# Altium PCB PX4FMUv2.4.6.PcbDoc (part 1 of 3)
Units mil, origin at the board's own origin, x right, y up, seen from the top; angles counter-clockwise.
Board outline 2695 x 2965 mil, 2 copper layers (Top, Bottom), stack 12.756 mil thick; 257 components, 261 nets, 1127 pads, 374 vias.
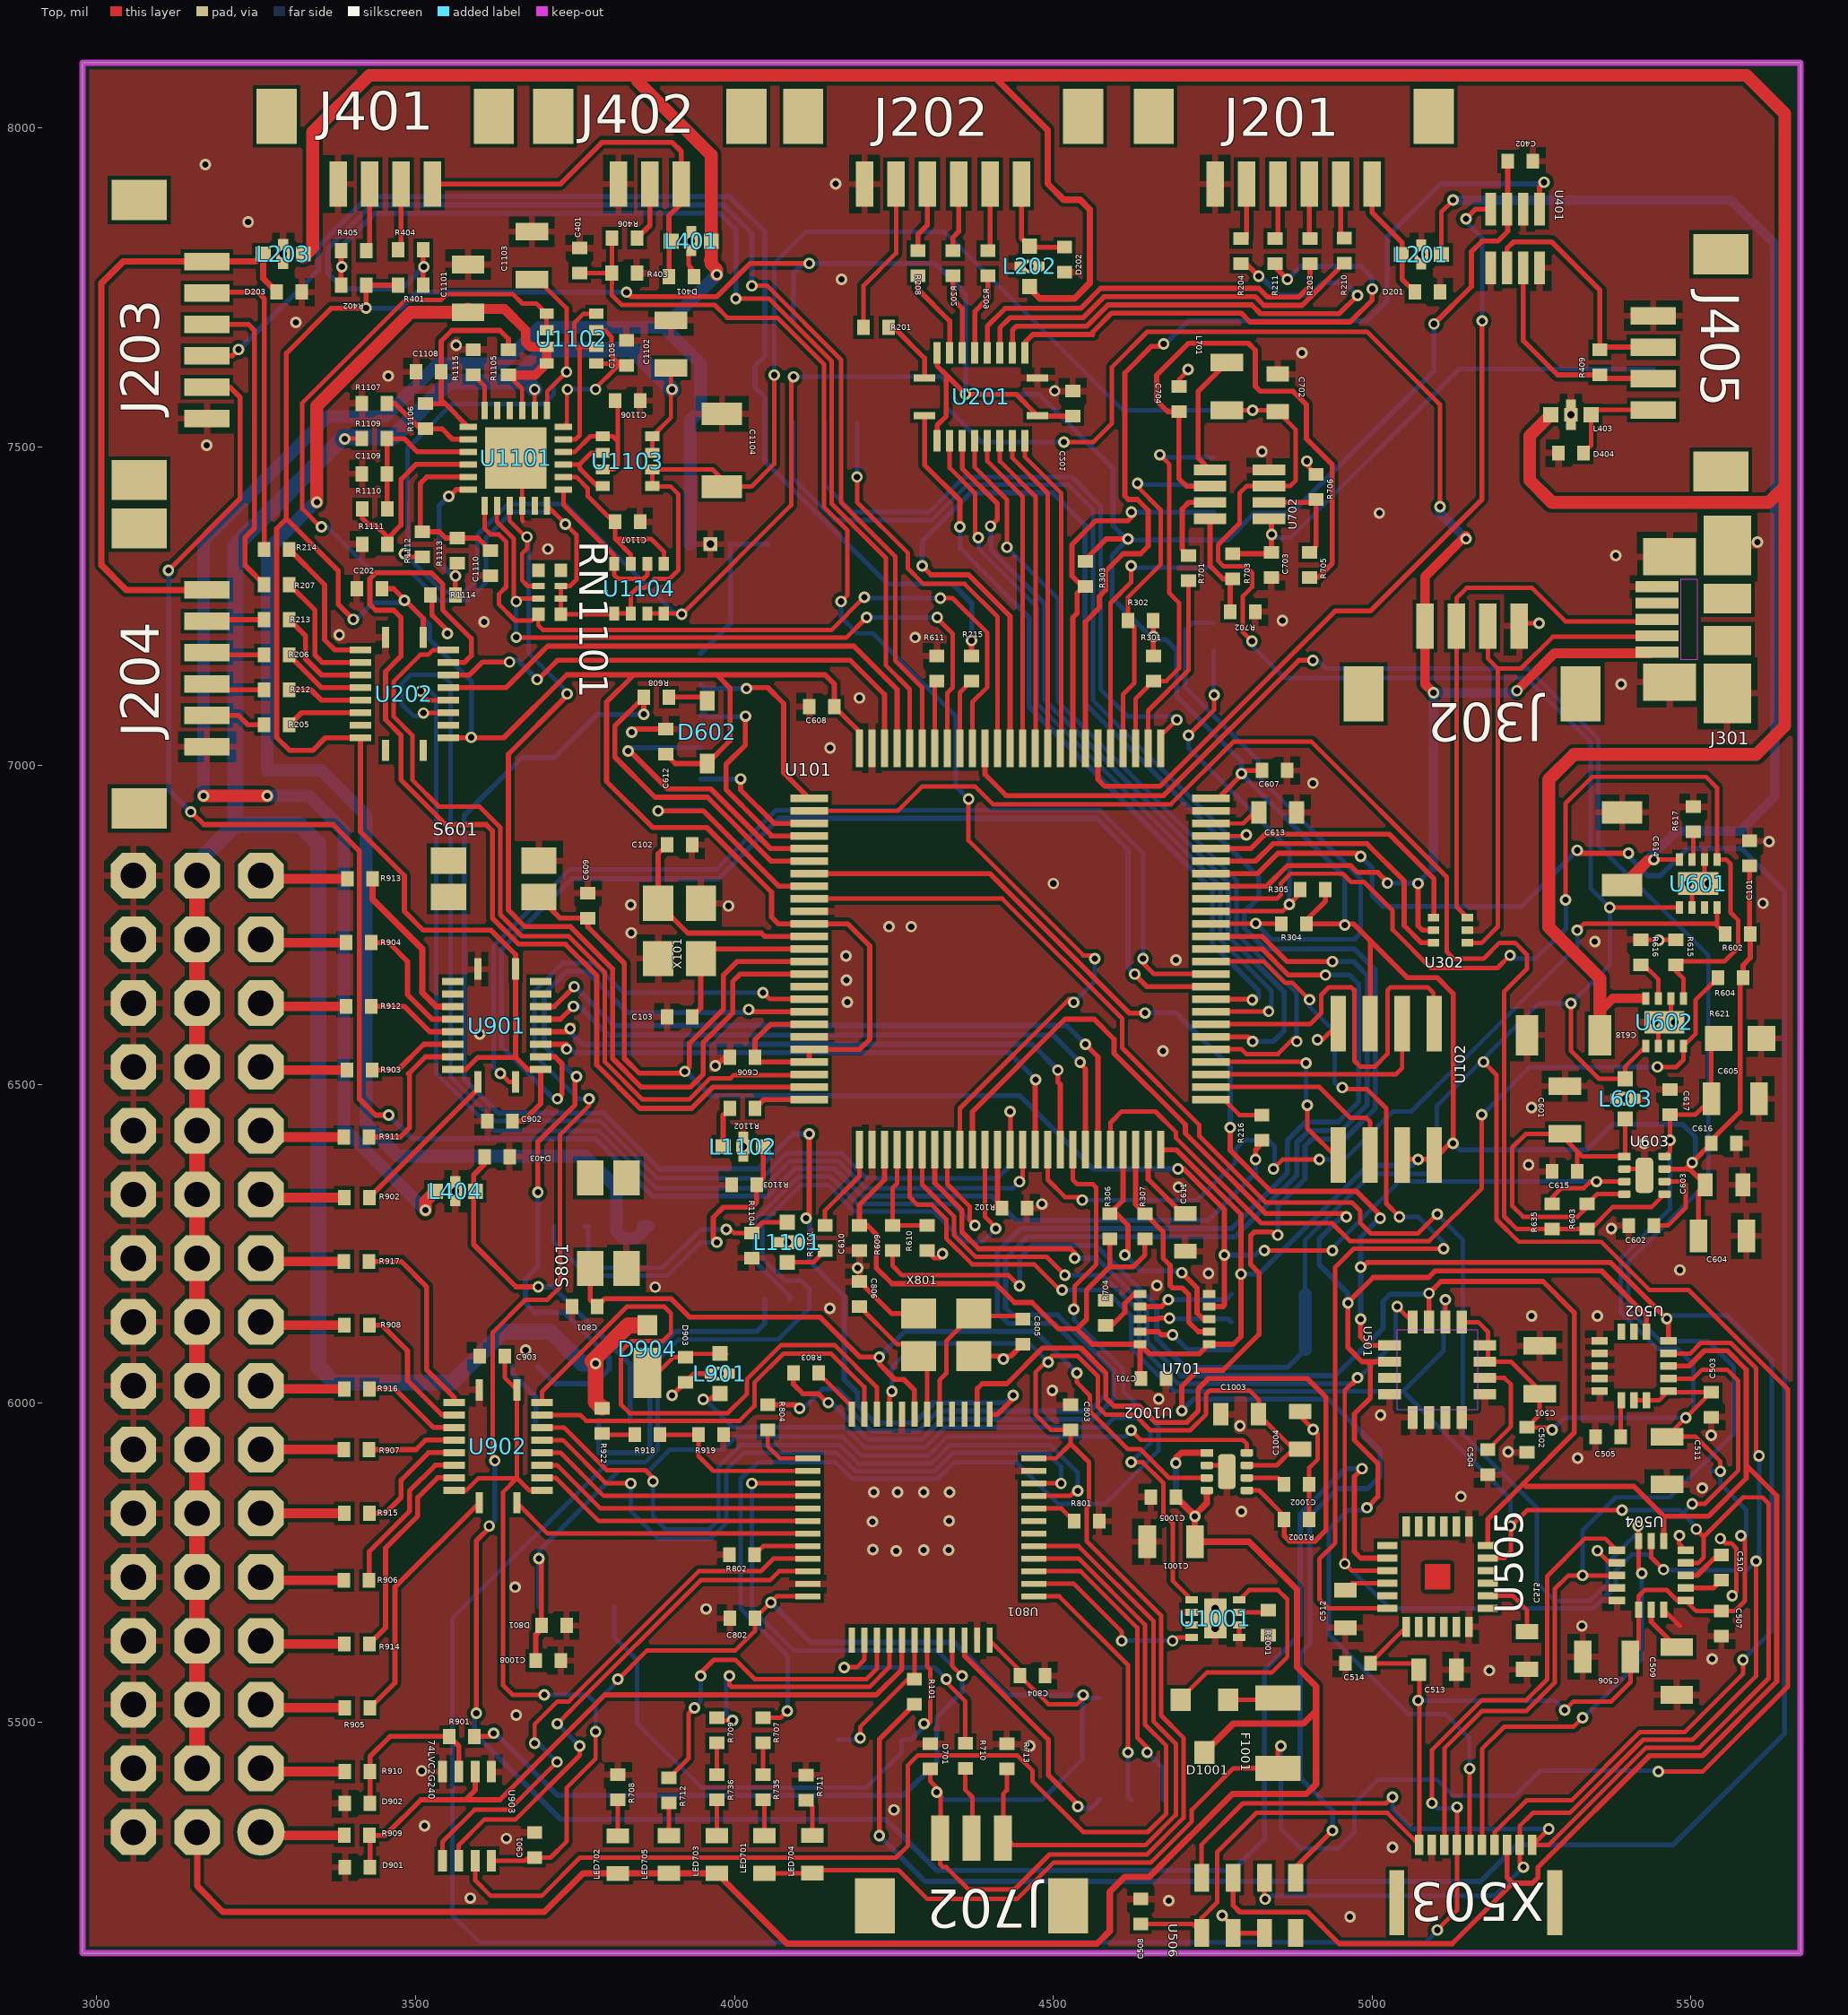
[diagram p0: Top view]
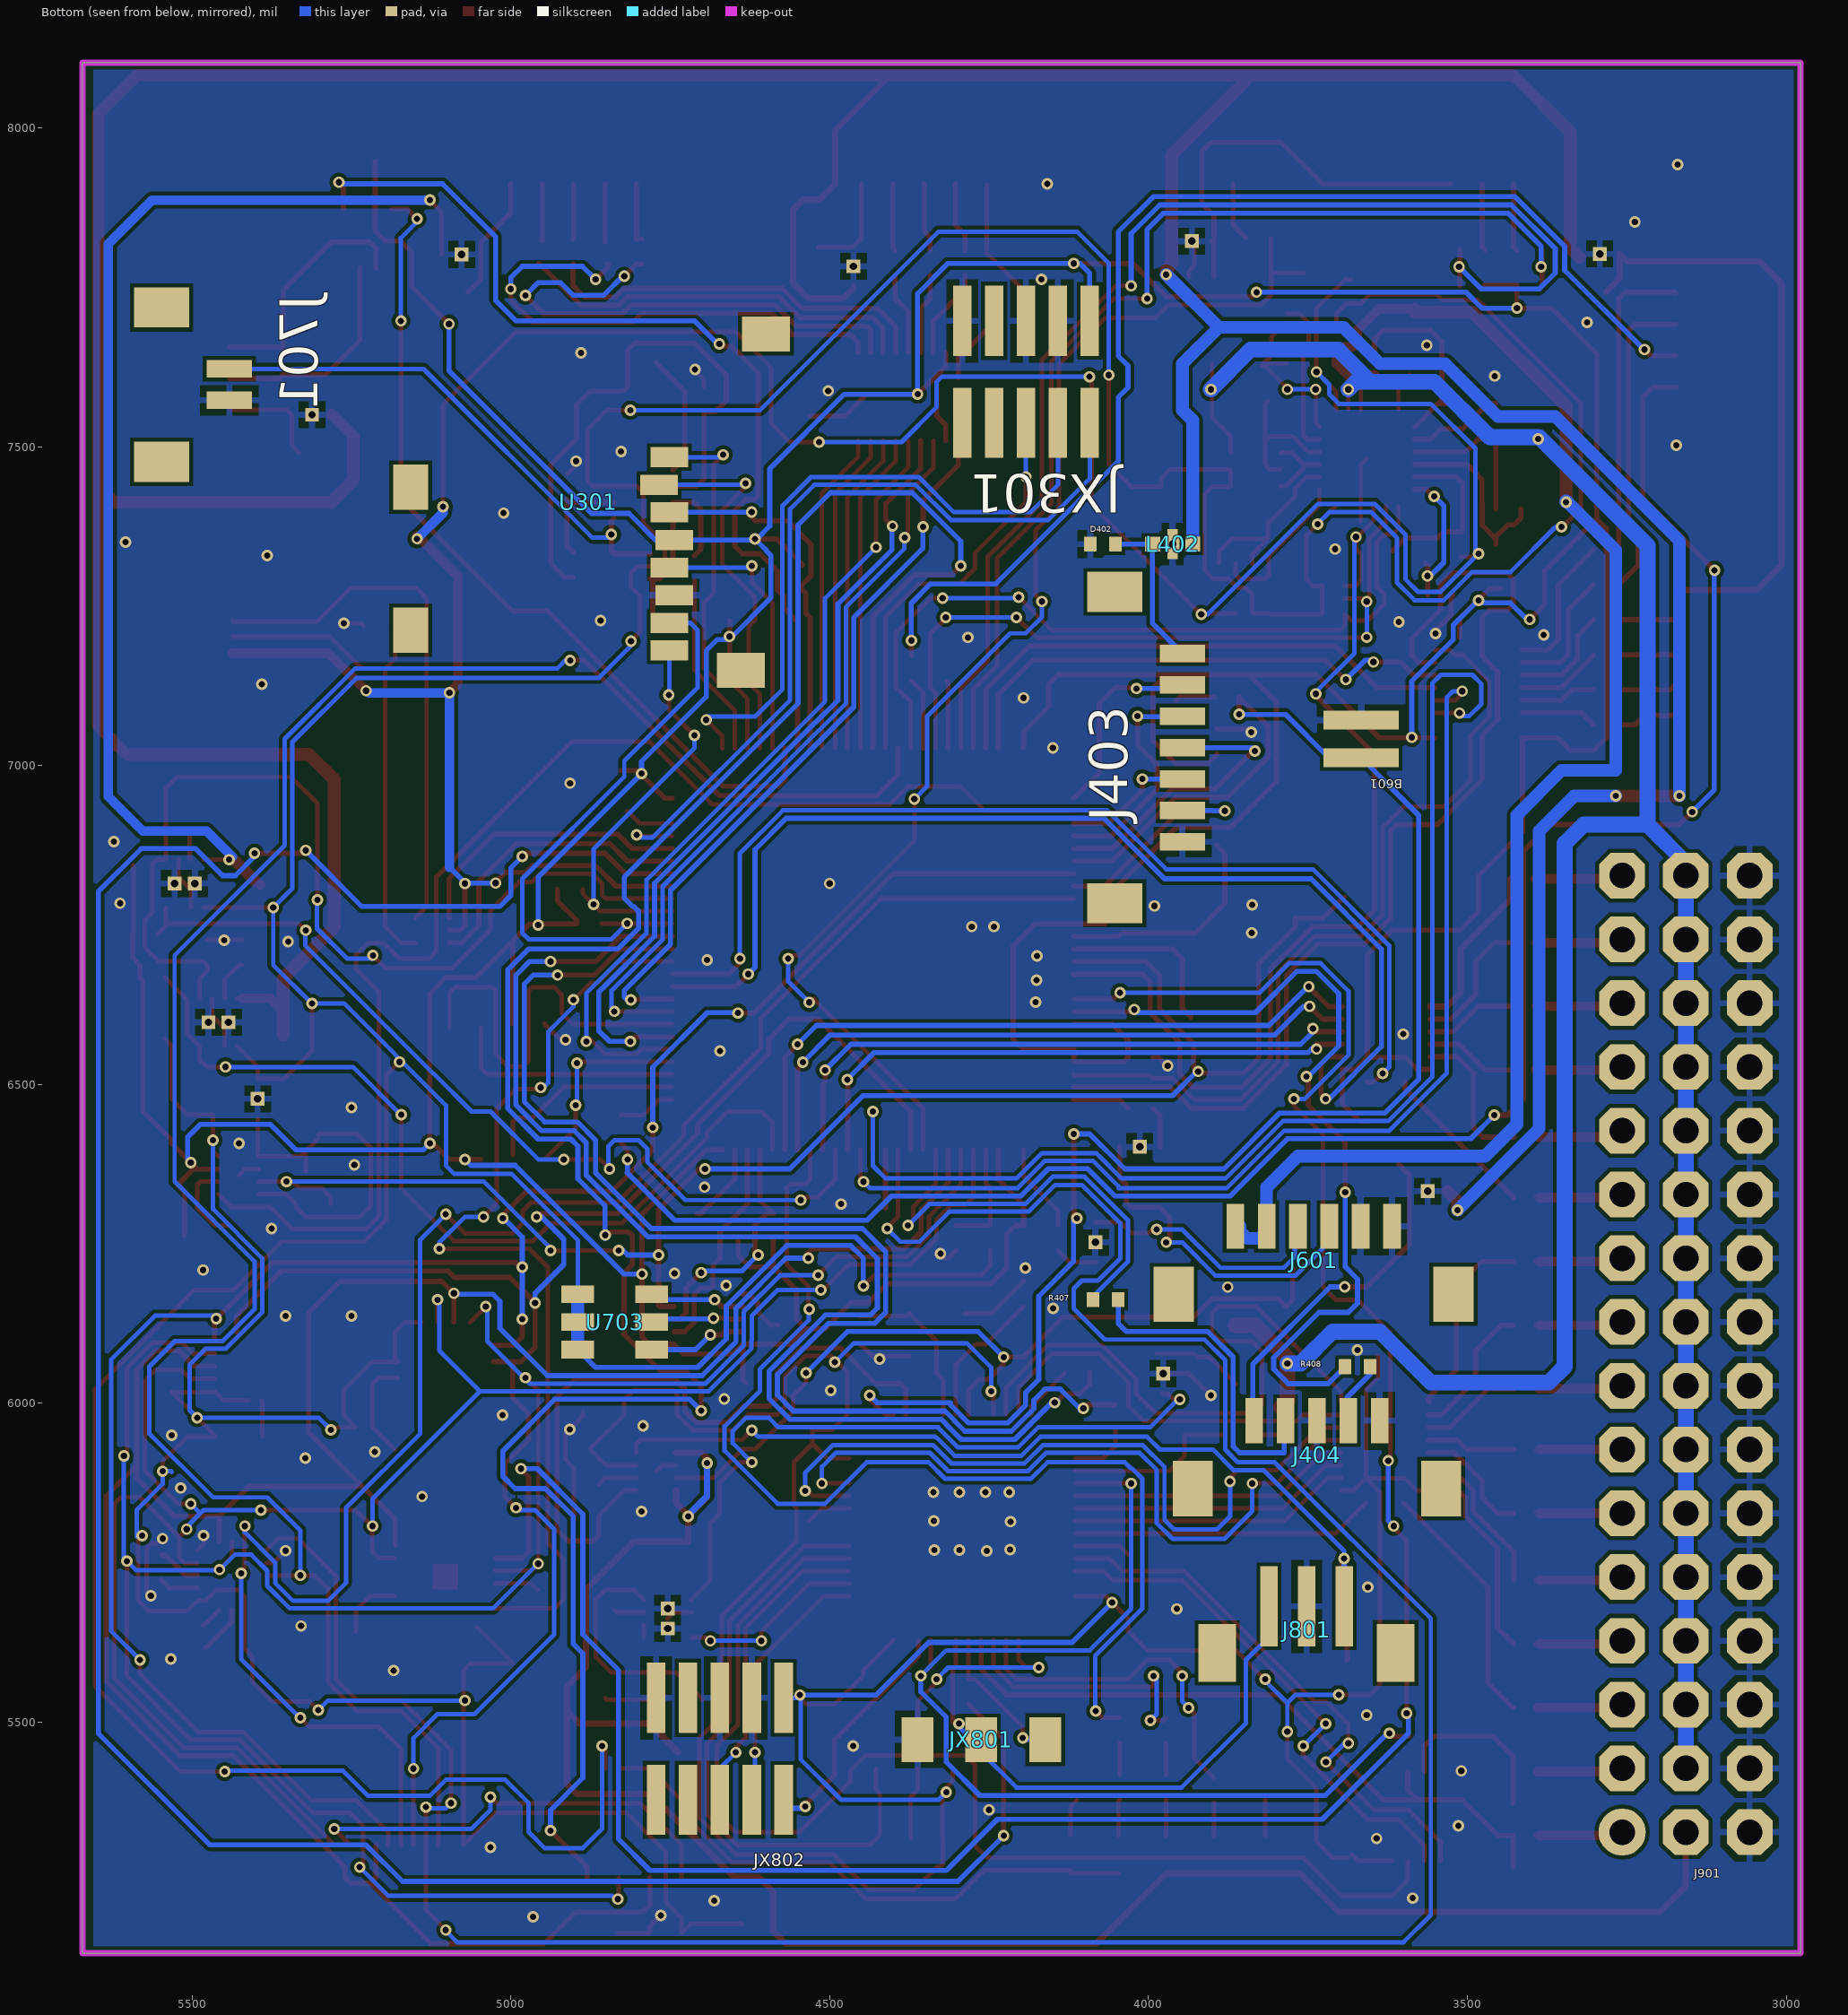
[diagram p1: Bottom view, seen from below]

## Layer stack, top to bottom
Top Solder: solder mask 0.4, Solder Resist, Dk 3.5
Top: signal copper 1.378
Dielectric 1: core 10, FR-4, Dk 4.2
Bottom: signal copper 1.378
Bottom Solder: solder mask 0.4, Solder Resist, Dk 3.5

## Board outline
2977.34,5137.68 5672.34,5137.68 5672.34,8102.68 2977.34,8102.68

## Design rules (kind name [scope] priority, off if disabled: settings)
Clearance Clearance_for_PolygonClass_Isolate_12 [InPolygonClass('Isolate_12')] p1: gap=0 ignorepadtopadclearanceinfootprint=FALSE except(12: Arc-Poly Track-Poly SMDPad-Poly THPad-Poly Via-Poly Fill-Poly Poly-Poly Poly-Region Poly-Text Poly-Hole)
Clearance Clearance_for_PolygonClass_Isolate_10 [InPolygonClass('Isolate_10')] p2: gap=0 ignorepadtopadclearanceinfootprint=FALSE except(10: Arc-Poly Track-Poly SMDPad-Poly THPad-Poly Via-Poly Fill-Poly Poly-Poly Poly-Region Poly-Text Poly-Hole)
Clearance "Clearance (Same Net)" [All] p3: gap=5 ignorepadtopadclearanceinfootprint=FALSE except(0: SMDPad-SMDPad SMDPad-THPad SMDPad-Via; 6: Arc-Fill Arc-Poly Arc-Region Track-Fill Track-Poly Track-Region SMDPad-Fill SMDPad-Poly SMDPad-Region THPad-Fill THPad-Poly THPad-Region Via-Fill Via-Poly Via-Region Fill-Fill Fill-Poly Fill-Region Poly-Poly Poly-Region Region-Region)
Clearance Clearance_for_NetClass_power [InNetClass('power') vs InNetClass('power')] p4: gap=6 ignorepadtopadclearanceinfootprint=FALSE
Clearance [All] p5: gap=5 ignorepadtopadclearanceinfootprint=FALSE except(3: SMDPad-SMDPad; 6: Arc-Fill Arc-Poly Arc-Region Track-Fill Track-Poly Track-Region SMDPad-Fill SMDPad-Poly SMDPad-Region THPad-Fill THPad-Poly THPad-Region Via-Fill Via-Poly Via-Region Fill-Fill Fill-Poly Fill-Region Poly-Poly Poly-Region Region-Region)
HoleSize HoleSize_For_NetClass_power [InNetClass('power')] p1: absolutevalues=TRUE maxlimit=7.87 minlimit=7.87 maxpercent=80.000 minpercent=20.000
HoleSize [All] p2: absolutevalues=TRUE maxlimit=100000 minlimit=7.87 maxpercent=80.000 minpercent=20.000
HoleToHoleClearance mdDrill [All] p1: gap=7.87 allowstackedmicrovias=TRUE
PasteMaskExpansion Expansion_SMDPaste_OFF [InPadClass('SMDPaste_OFF')] p1: expansion=0
PasteMaskExpansion mlMinCreamFrame [All] p2: expansion=-1
PolygonConnect PolygonConnect_For_PolygonThermal_ON_Width100000_Gap80000 [InPolygonClass('PolygonThermal_ON_Width100000_Gap80000')] p1: connectstyle=Relief reliefconductorwidth=10 reliefentries=4 polygonreliefangle="90 Angle" airgapwidth=8
PolygonConnect PolygonConnect_For_PolygonThermal_OFF [InPolygonClass('PolygonThermal_OFF')] p2: connectstyle=Direct reliefconductorwidth=10 reliefentries=4 polygonreliefangle="90 Angle" airgapwidth=10
PolygonConnect ThermalVias [IsVia] p3: connectstyle=Direct reliefconductorwidth=10 reliefentries=4 polygonreliefangle="90 Angle" airgapwidth=10
PolygonConnect [All] p4: connectstyle=Relief reliefconductorwidth=10 reliefentries=4 polygonreliefangle="90 Angle" airgapwidth=10
RoutingVias [All] p1: holewidth=7.87 width=17.72 viastyle="Through Hole" minholewidth=7.87 minwidth=17.72 maxholewidth=100 maxwidth=100
SolderMaskExpansion mlMinStopFrame [All] p1: expansion=1
Width Width_For_NetClass_power [InNetClass('power')] p1: maxlimit=25 minlimit=5.91 preferedwidth=5.91
Width [All] p2: maxlimit=10000 minlimit=5.91 preferedwidth=5.91
27 further rules are at their usual default settings.

## Classes and differential pairs
net class "except gnd": !ACCEL_MAG_CS !BARO_CS !FMU-LED_AMBER !FRAM_CS !GYRO_CS !IO-LED_AMBER !IO-LED_BLUE !IO-LED_SAFETY !MPU_CS !SBUS_OUTPUT_EN !SPI_EXT_NSS !VBUS_VALID !VDD_5V_HIPOWER_OC !VDD_5V_PERIPH_EN !VDD_5V_PERIPH_OC !VDD_BRICK_VALID !VDD_SERVO_VALID ACCEL_DRDY ALARM BATT_CURRENT_SENS BATT_CURRENT_SENS_PROT BATT_VOLTAGE_SENS BATT_VOLTAGE_SENS_PROT CAN1_RX CAN1_TX CAN2_RX CAN2_TX CAN_H CAN_L FMU-!RESET FMU-BOOT0 FMU-CH1 FMU-CH1-PROT FMU-CH2 FMU-CH3 FMU-CH4 FMU-CH5 FMU-CH6 FMU-CH6-PROT FMU-I2C1_SCL FMU-I2C1_SDA FMU-I2C2_SCL FMU-I2C2_SDA FMU-SWCLK FMU-SWDIO FMU-SWO FMU-UART4_RX FMU-UART4_TX FMU-UART7_RX FMU-UART7_TX FMU-UART8_RX FMU-UART8_TX FMU-USART2_CTS FMU-USART2_RTS FMU-USART2_RX FMU-USART2_TX FMU-USART3_CTS FMU-USART3_RTS FMU-USART3_RX FMU-USART3_TX FMU-VDD_3V3 FMU-VDD_5V5 FMU_AUX_ADC1 FMU_AUX_ADC1_PROT FMU_AUX_ADC2 FMU_AUX_ADC2_PROT FRAM_MISO FRAM_MOSI FRAM_SCK GPIO_EXT_1 GYRO_DRDY IO-!RESET IO-!VDD_SERVO_IN_FAULT IO-BOOT0 IO-BOOT1 IO-CH1 IO-CH1-PROT IO-CH2 IO-CH3 IO-CH4 IO-CH5 IO-CH6 IO-CH7 IO-CH8 IO-CH8-PROT IO-SWCLK IO-SWDIO IO-SWO IO-USART1_RX IO-USART1_TX IO-VDD_3V3 IO-VDD_5V5 MAG_DRDY MPU_DRDY N$1 N$2 N$3 N$4 N$5 N$6 N$7 N$8 N$9 N$10 N$11 N$12 N$13 N$14 N$15 N$16 N$17 N$18 N$19 N$20 N$21 N$22 N$23 N$24 N$25 N$26 N$27 N$28 N$29 N$30 N$31 N$32 N$33 N$34 N$35 N$36 N$37 N$38 N$39 N$40 N$41 N$42 N$43 N$44 N$45 N$46 N$47 N$48 N$49 N$50 N$51 N$52 N$53 N$54 N$55 N$56 N$57 N$58 N$59 N$60 N$61 N$62 N$63 N$64 N$65 N$66 N$67 N$68 N$69 N$70 N$71 N$72 N$73 N$74 N$75 N$77 N$78 N$79 N$82 N$83 N$84 N$85 N$86 N$87 N$88 N$89 N$90 N$91 N$92 N$93 N$94 N$95 N$96 N$97 N$98 N$99 N$100 N$101 N$102 N$103 N$104 N$105 N$106 N$107 N$109 N$110 N$113 N$115 OTG_DM1 OTG_DP1 OTG_FS_DM OTG_FS_DP PB2-BOOT1 PPM-SBUS-PROT PPM_INPUT PRESSURE_SENS PRESSURE_SENS_IN RGB_LED_3 RGB_LED_4 RGB_LED_14 RSSI_IN SAFETY SBUS_INPUT SBUS_OUTPUT SDIO_CK SDIO_CMD SDIO_D0 SDIO_D1 SDIO_D2 SDIO_D3 SERIAL1_CTS SERIAL1_RTS SERIAL1_RX SERIAL1_TX SERIAL2_CTS SERIAL2_RTS SERIAL2_RX SERIAL2_TX SERIAL3_RX SERIAL3_TX SERIAL4_RX SERIAL4_TX SERIAL5_RX SERIAL5_TX SERIAL_FMU_TO_IO SERIAL_IO_TO_FMU SPI_EXT_MISO SPI_EXT_MOSI SPI_EXT_SCK SPI_INT_MISO SPI_INT_MOSI SPI_INT_SCK VBAT VBUS VDD_3V3_SENSORS VDD_3V3_SENSORS_EN VDD_3V3_SPEKTRUM VDD_3V3_SPEKTRUM_EN VDD_5V_BRICK VDD_5V_HIPOWER VDD_5V_IN VDD_5V_PERIPH VDD_5V_SENS VDD_SERVO VDD_SERVO_IN VDD_SERVO_SENS
pad class SMDPaste_OFF: U1101-P$25
net class power: FMU-VDD_3V3 FMU-VDD_5V5 GND IO-VDD_3V3 IO-VDD_5V5 MPU_DRDY N$4 N$5 N$41 N$42 N$48 N$97 N$98 N$100 N$101 N$106 N$107 N$110 VBUS VDD_3V3_SENSORS VDD_3V3_SPEKTRUM VDD_5V_BRICK VDD_5V_HIPOWER VDD_5V_IN VDD_5V_PERIPH VDD_SERVO VDD_SERVO_IN

## Components (designator, comment, footprint, x,y, rotation, side; value= is the part's Value field where it differs from the comment)
B601 "MS621FE" MS621FE 3463.95,7042.21 r0 bottom
C101 "0u1" 0402-CAP 5592.34,6862.68 r90 top
C102 "8p" 0402-CAP 3913.88,6875.99 r0 top
C103 "8p" 0402-CAP 3913.88,6605.99 r0 top
C201 "0u1" 0402-CAP 4530.77,7568 r90 top
C202 "0u1" 0402-CAP 3427.34,7277.68 r180 top
C401 "0u1" 0402-CAP 3757.34,7792.37 r90 top
C402 "0u1" 0402-CAP 5232.65,7947.99 r0 top
C501 "10u/10V" 0805-CAP 5262.96,6052.68 r90 top
C502 "0u1" 0402-CAP 5243.36,5942.68 r270 top
C503 "0u1" 0402-CAP 5532.34,5997.99 r270 top
C504 "10n" 0402-CAP 5181.67,5907.68 r270 top
C505 "10n" 0402-CAP 5370.13,5947.68 r180 top
C506 "10u/10V" 0805-CAP 5367.96,5602.68 r180 top
C507 "0u1" 0402-CAP 5547.96,5654.49 r270 top
C508 "0u1" 0402-CAP 4637.34,5202.99 r90 top
C509 "10u/10V" 0805-CAP 5477.96,5580.28 r270 top
C510 "0u47" 0402-CAP 5547.96,5742.68 r90 top
C511 "10u/10V" 0805-CAP 5462.96,5910.28 r270 top
C512 "2u2" 0603-CAP 4958.27,5677.68 r270 top
C513 "2u2" 0603-CAP 5102.96,5582.37 r0 top
C514 "0u1" 0402-CAP 4977.96,5592.37 r180 top
C515 "0u01" 0603-CAP 5242.96,5612.37 r270 top
C601 "10u/25V" 0805-CAP 5302.34,6460.08 r90 top
C602 "10n" 0402-CAP 5422.34,6278.9 r0 top
C603 "1u" 0603-CAP 5552.34,6342.68 r0 top
C604 "22u/25V" 0805-CAP 5549.74,6262.68 r0 top
C605 "22u/25V" 0805-CAP 5569.74,6477.68 r0 top
C606 "0u1" 0402-CAP 4012.65,6542.68 r180 top
C607 "0u1" 0402-CAP 4847.34,6992.68 r0 top
C608 "0u1" 0402-CAP 4137.07,7092.68 r180 top
C609 "0u1" 0402-CAP 3770.09,6780.8 r270 top
C610 "0u1" 0402-CAP 4196.12,6259.38 r270 top
C611 "2u2" 0603-CAP 4707.34,6268.15 r270 top
C612 "0u1" 0402-CAP 3892.34,7037.99 r90 top
C613 "2u2" 0603-CAP 4852.34,6926.86 r0 top
C614 "100u" 1206-CAP 5392.34,6869.77 r90 top
C615 "0u1" 0402-CAP 5302.34,6363.84 r180 top
C616 "0u1" 0402-CAP 5552.03,6407.68 r0 top
C617 "0u1" 0402-CAP 5467.34,6472.68 r90 top
C618 "100u" 1206-CAP 5300.45,6577.44 r180 top
C701 "0u1" 0402-CAP 4657.34,6038.99 r0 top
C702 "1u" 0603-CAP 4852.34,7584.85 r90 top
C703 "5n6" 0402-CAP 4842.34,7314.85 r270 top
C704 "0u47" 0402-CAP 4697.34,7574.85 r90 top
C801 "0u1" 0402-CAP 3764.88,6151.86 r0 top
C802 "0u1" 0402-CAP 4012.34,5662.99 r180 top
C803 "0u1" 0402-CAP 4527.34,5977.99 r90 top
C804 "0u1" 0402-CAP 4467.34,5572.99 r0 top
C805 "8p" 0402-CAP 4452.34,6112.68 r270 top
C806 "8p" 0402-CAP 4196.12,6171.54 r270 top
C901 "0u1" 0402-CAP 3686.71,5307.36 r90 top
C902 "0u1" 0402-CAP 3632.34,6442.68 r180 top
C903 "0u1" 0402-CAP 3619.94,6074.22 r180 top
C1001 "10u/25V" 0805-CAP 4684.94,5782.99 r180 top
C1002 "10n" 0402-CAP 4882.03,5872.99 r0 top
C1003 "1u" 0603-CAP 4792.34,5982.99 r180 top
C1004 "10u" 0603-CAP 4887.34,5957.99 r90 top
C1005 "0u1" 0402-CAP 4672.65,5852.99 r180 top
C1008 "2u2" 0402-CAP 3708.09,5596.8 r0 top
C1101 "22u/25V" 0805-CAP 3582.34,7748.67 r90 top
C1102 "22u/25V" 0805-CAP 3900.37,7661.3 r90 top
C1103 "22u/25V" 0805-CAP 3682.34,7800.08 r90 top
C1104 "100u" 1206-CAP 3980.48,7494.77 r90 top
C1105 "0u1" 0402-CAP 3830.79,7647.53 r90 top
C1106 "0u1" 0402-CAP 3832.34,7572.68 r0 top
C1107 "0u1" 0402-CAP 3832.34,7382.68 r0 top
C1108 "10p/25V" 0402-CAP 3520.48,7617.84 r180 top
C1109 "10p/25V" 0402-CAP 3435.48,7457.84 r180 top
C1110 "10p/25V" 0402-CAP 3617.34,7317.84 r270 top
D201 "PESD0402-140" 0402-TVS 5087.02,7742.96 r0 top
D202 "PESD0402-140" 0402-TVS 4517.89,7793.58 r270 top
D203 "PESD0402-140" 0402-TVS 3302.03,7742.96 r0 top
D401 "PESD0402-140" 0402-TVS 3917.34,7766.93 r0 top
D402 "PESD0402-140" 0402-TVS 4072.03,7347.68 r0 bottom
D403 "PESD0402-140" 0402-TVS 3627.65,6386.93 r0 top
D404 "PESD0402-140" 0402-TVS 5312.03,7490.47 r180 top
D602 "RB751V40T1G" SOD323 3957.34,7052.68 r270 top
D701 "PESD0402-140" 0402-TVS 4307.34,5446.48 r90 top
D801 "PESD0402-140" 0402-TVS 3717.03,5651.8 r0 top
D901 "PESD0402-140" 0402-TVS 3408.74,5272.68 r180 top
D902 "PESD0402-140" 0402-TVS 3408.74,5372.68 r180 top
D903 "PESD0402-140" 0402-TVS 3923.13,6052.99 r270 top
D904 "MSS1P4-M3" MICROSMP 3863.59,6096.89 r90 top
D1001 "PMEG2005CT" SOT23-3 4737.34,5495.99 r180 top
F1001 "0ZCA0035FF2G" PTC-1206 4852.34,5482.68 r90 top
J201 "" DF13C-6P-1.25V 4877.34,7947.68 r180 top
J202 "" DF13C-6P-1.25V 4327.34,7947.68 r180 top
J203 "" DF13C-6P-1.25V 3137.34,7667.68 r270 top
J204 "" DF13C-6P-1.25V 3137.34,7152.68 r270 top
J301 "47346-0001" MOLEX-47346-0001 5557.34,7229.46 r180 top
J302 "" DF13C-4P-1.25V 5157.06,7183.55 r0 top
J401 "" DF13C-4P-1.25V 3452.34,7947.68 r180 top
J402 "" DF13C-3P-1.25V 3867.34,7947.68 r180 top
J403 "" DF13C-7P-1.25V 3982.34,7028.47 r270 bottom
J404 "" DF13C-5P-1.25V 3735.96,5937.25 r180 bottom
J405 "" DF13C-4P-1.25V 5476.47,7631.93 r90 top
J601 "" DF13C-6P-1.25V 3741.16,6242.25 r180 bottom
J701 "" DF13C-2P-1.25V 5477.34,7597.68 r270 bottom
J702 "" DF13C-3P-1.25V 4371.94,5282.68 r0 top
J801 "" JST-ZH-SMT-VERTICAL 3752.34,5612.68 r0 bottom
J901 "" 3X16RA 3157.34,6077.68 r0 bottom
JX301 "ARM_MINI_JTAG-SMT" FTSH-105-01-XXX-DV-K 4192.34,7617.66 r0 bottom
JX801 "" HEADER_3X01_SMD_H_BOARD_EDGE_SHORT 4262.34,5472.68 r0 bottom
JX802 "ARM_MINI_JTAG-SMT" FTSH-105-01-XXX-DV-K 4672.34,5458.3 r0 bottom
L201 "" KYOCERA-KNH16-DA 5077.34,7801.93 r180 top
L202 "" KYOCERA-KNH16-DA 4462.89,7783.27 r90 top
L203 "" KYOCERA-KNH16-DA 3292.34,7802.68 r180 top
L401 "" KYOCERA-KNH16-DA 3932.34,7822.68 r180 top
L402 "" KYOCERA-KNH16-DA 3962.34,7347.68 r0 bottom
L403 "" KYOCERA-KNH16-DA 5312.03,7550.47 r0 top
L404 "" KYOCERA-KNH16-DA 3562.34,6332.68 r0 top
L603 "" KYOCERA-KNH16-DA 5397.34,6477.68 r270 top
L701 "47uH" 0805-IND 4772.34,7594.85 r90 top
L901 "" KYOCERA-KNH16-DA 3977.34,6046.78 r270 top
L1101 "" KYOCERA-KNH16-DA 4083.09,6252.68 r270 top
L1102 "" KYOCERA-KNH16-DA 4013.84,6402.68 r180 top
LED701 "AMBER" 0603-LED 4046.94,5292.52 r270 top
LED702 "GREEN" 0603-LED 3817.34,5292.36 r270 top
LED703 "AMBER" 0603-LED 3972.34,5292.52 r270 top
LED704 "GREEN" 0603-LED 4122.34,5292.99 r270 top
LED705 "BLUE" 0603-LED 3897.34,5292.52 r270 top
R101 "470R" 0402-RES 4282.34,5547.99 r90 top
R102 "10K" 0402-RES 4439.35,6306.11 r0 top
R201 "120R" 0402-RES 4222.34,7687.68 r180 top
R202 "120R" 0402-RES 4342.89,7788.27 r90 top
R203 "120R" 0402-RES 4902.89,7806.93 r90 top
R204 "120R" 0402-RES 4794.47,7806.93 r90 top
R205 "120R" 0402-RES 3282.34,7064.14 r180 top
R206 "120R" 0402-RES 3282.34,7173.98 r180 top
R207 "120R" 0402-RES 3282.34,7284.14 r180 top
R208 "120R" 0402-RES 4287.89,7788.27 r90 top
R209 "120R" 0402-RES 4397.58,7788.27 r90 top
R210 "120R" 0402-RES 4956.71,7807.68 r90 top
R211 "120R" 0402-RES 4847.89,7806.93 r90 top
R212 "120R" 0402-RES 3282.34,7119.14 r180 top
R213 "120R" 0402-RES 3282.34,7229.14 r180 top
R214 "120R" 0402-RES 3282.34,7339.14 r180 top
R215 "120R" 0402-RES 4371.94,7152.68 r90 top
R216 "120R" 0402-RES 4827.34,6432.68 r270 top
R301 "100K" 0402-RES 4657.34,7152.68 r90 top
R302 "100K" 0402-RES 4637.34,7227.68 r0 top
R303 "100K" 0402-RES 4550.45,7300.73 r90 top
R304 "100K" 0402-RES 4877.34,6752.05 r0 top
R305 "100K" 0402-RES 4907.34,6805.79 r0 top
R306 "1K5" 0402-RES 4588.88,6277.99 r270 top
R307 "1K5" 0402-RES 4643.88,6277.99 r270 top
R401 "1K5" 0402-RES 3492.34,7753.61 r180 top
R402 "1K5" 0402-RES 3402.65,7753.61 r0 top
R403 "10K/0.1%" 0402-RES 3827.34,7772.68 r180 top
R404 "120R" 0402-RES 3492.03,7809.12 r180 top
R405 "120R" 0402-RES 3402.65,7807.68 r0 top
R406 "10K/0.1%" 0402-RES 3827.65,7827.68 r0 top
R407 "10K/0.1%" 0402-RES 4067.34,6162.68 r180 bottom
R408 "10K/0.1%" 0402-RES 3672.03,6057.68 r180 bottom
R409 "120R" 0402-RES 5357.54,7632.68 r90 top
R602 "1M" 0402-RES 5573.78,6736.29 r0 top
R603 "10K" 0402-RES 5337.34,6292.99 r270 top
R604 "1M" 0402-RES 5562.34,6667.68 r0 top
R608 "1K" 0402-RES 3877.65,7107.68 r0 top
R609 "10K/0.1%" 0402-RES 4248.13,6259.38 r270 top
R610 "10K/0.1%" 0402-RES 4302.34,6259.38 r270 top
R611 "10K" 0402-RES 4317.34,7152.68 r270 top
R615 "10K" 0402-RES 5476.71,6707.48 r90 top
R616 "25K5" 0402-RES 5421.71,6707.48 r90 top
R617 "16K5" 0402-RES 5504.09,6916.29 r90 top
R621 "220R" 0603-RES 5577.34,6572.68 r180 top
R635 "10K" 0402-RES 5282.65,6292.99 r270 top
R701 "9K09" 0402-RES 4712.34,7309.85 r270 top
R702 "10K" 0402-RES 4797.34,7241.42 r0 top
R703 "100K" 0402-RES 4781.5,7312.78 r270 top
R704 "10K" 0402-RES 4582.34,6142.17 r270 top
R705 "453K" 0402-RES 4902.34,7315.16 r90 top
R706 "16K5" 0402-RES 4912.34,7437.37 r90 top
R707 "220R" 0402-RES 4045.12,5487.68 r270 top
R708 "220R" 0402-RES 3817.34,5397.83 r270 top
R709 "220R" 0402-RES 3972.34,5487.52 r270 top
R710 "68R" 0402-RES 4362.34,5447.2 r90 top
R711 "220R" 0402-RES 4112.34,5397.68 r270 top
R712 "220R" 0402-RES 3897.34,5392.83 r270 top
R713 "1K5" 0402-RES 4427.34,5446.48 r90 top
R735 "220R" 0402-RES 4045.12,5397.99 r270 top
R736 "220R" 0402-RES 3972.34,5397.83 r270 top
R801 "10K" 0402-RES 4552.34,5815.43 r0 top
R802 "10K" 0402-RES 4012.03,5762.68 r180 top
R803 "220R" 0402-RES 4112.34,6047.68 r180 top
R804 "220R" 0402-RES 4052.34,5978.3 r90 top
R901 "10K" 0402-RES 3572.34,5477.68 r180 top
R902 "220R" 0402-RES 3407.59,6322.68 r180 top
R903 "220R" 0402-RES 3412.34,6522.68 r180 top
R904 "220R" 0402-RES 3411.03,6722.68 r180 top
R905 "220R" 0402-RES 3408.74,5522.68 r180 top
R906 "220R" 0402-RES 3407.34,5722.68 r180 top
R907 "220R" 0402-RES 3407.34,5927.68 r180 top
R908 "220R" 0402-RES 3407.65,6122.68 r180 top
R909 "220R" 0402-RES 3407.59,5322.68 r180 top
R910 "220R" 0402-RES 3408.74,5422.68 r180 top
R911 "220R" 0402-RES 3407.34,6417.68 r180 top
R912 "220R" 0402-RES 3411.03,6622.68 r180 top
R913 "220R" 0402-RES 3412.74,6822.68 r180 top
R914 "220R" 0402-RES 3407.65,5622.68 r180 top
R915 "220R" 0402-RES 3407.59,5827.68 r180 top
R916 "220R" 0402-RES 3407.59,6022.68 r180 top
R917 "220R" 0402-RES 3407.34,6222.68 r180 top
R918 "10K/0.1%" 0402-RES 3863.44,5950.99 r180 top
R919 "10K/0.1%" 0402-RES 3963.13,5950.99 r180 top
R922 "10K/0.1%" 0402-RES 3792.34,5972.68 r90 top
R1001 "100K" 0402-RES 4837.34,5656.46 r90 top
R1002 "10K" 0402-RES 4882.03,5817.99 r180 top
R1101 "10K/0.1%" 0402-RES 4142.34,6259.38 r270 top
R1102 "10K/0.1%" 0402-RES 4012.65,6462.68 r180 top
R1103 "1M" 0402-RES 4015.17,6342.68 r180 top
R1104 "1M" 0402-RES 4027.34,6247.68 r270 top
R1105 "453K" 0402-RES 3645.48,7632.53 r90 top
R1106 "56K" 0402-RES 3515.48,7548.15 r270 top
R1107 "105K" 0402-RES 3435.48,7568 r180 top
R1109 "453K" 0402-RES 3435.48,7513 r0 top
R1110 "56K" 0402-RES 3435.79,7402.84 r180 top
R1111 "105K" 0402-RES 3435.79,7347.22 r180 top
R1112 "453K" 0402-RES 3510.48,7347.22 r90 top
R1113 "56K" 0402-RES 3565.48,7337.53 r270 top
R1114 "105K" 0402-RES 3542.65,7267.68 r180 top
R1115 "0R" 0402-RES 3590.48,7632.84 r270 top
RN1101 "1M" EXB28V 3710.06,7272.13 r270 top
S601 "RESET" EVQP7J01K 3622.65,6822.68 r180 top
S801 "RESET" EVQP7J01K 3802.34,6282.68 r90 top
U101 "STM32F4X7VX" TQFP100 4432.34,6712.68 r0 top
U102 "FM25V01" SO08 5022.34,6492.37 r180 top
U201 "" QFN20-RGY 4386.87,7578.78 r90 top
U202 "" QFN20-RGY 3482.34,7112.68 r180 top
U301 "" MICROSD 4858.13,7407.56 r270 bottom
U302 "NUF2042XV6" SOT563-6 5123.14,6742.05 r90 top
U401 "MAX3051" SOT23-8 5224.54,7826.77 r180 top
U501 "L3GD20" L3G4200DH-MAN 5102.34,6052.68 r270 top
U502 "L3GD20H" LGA-16L 5410.96,6058.68 r180 top
U504 "LSM303D" LGA-16L 5437.96,5730.28 r180 top
U505 "MPU-6000" QFN-24 5102.96,5727.99 r270 top
U506 "MS5611-01BA" MS5611-01BA 4806.72,5212.68 r90 top
U601 "" QFN8-DSG 5511.87,6815.28 r0 top
U602 "" QFN8-DSG 5458.84,6597.68 r0 top
U603 "MIC5332" MLF-8-EPAD 5427.34,6357.68 r0 top
U701 "TCA62724FMG" SON10 4690.37,6132.17 r90 top
U702 "LT3469" SOT23-8 4792.34,7425.69 r90 top
U703 "" 6-PLCC 4837.34,6127.68 r0 bottom
U801 "STM32F10XCXT6" TQFP48 4292.34,5805.59 r180 top
U901 "" QFN20-RGY 3627.34,6592.68 r180 top
U902 "" QFN20-RGY 3629.34,5932.68 r180 top
U903 "74LVC2G240" TSSOP8_SOT505-2 3580.65,5352.68 r180 top
U1001 "" QFN8-DSG 4754.31,5662.68 r270 top
U1002 "MIC5332" MLF-8-EPAD 4772.34,5892.99 r0 top
U1101 "" MO-220 3657.18,7482.48 r0 top
U1102 "" 1206-8 3744.48,7669.84 r90 top
U1103 "" 1206-8 3832.34,7477.68 r270 top
U1104 "" 1206-8 3850.48,7277.84 r180 top
X101 "3.2x2.5 mm / 24 MHz / 15 ppm" OSCILLATOR-3.2X2.5 3913.88,6740.99 r90 top
X503 "" 51281-1094 5074.23,5307.68 r0 top
X801 "3.2x2.5 mm / 24 MHz / 15 ppm" OSCILLATOR-3.2X2.5 4332.34,6107.68 r0 top

## Footprints (in the part's own frame and the unit in brackets; to place one, negate y for a bottom-side part, rotate by r counter-clockwise, add the part's x,y. Pads: shape width x height; smd on the part's side, far side on the other; paste and mask are expansions set on the pad)
3X16RA [mil] "3X16RA"
  round 74 / inner round 60 / far side round 74 hole 40: 1(100,750)
  oct 71.65x71.65 / inner oct 60x60 / far side oct 71.65x71.65 hole 40: 2(0,750) 3(-100,750) 4(100,650) 5(0,650) 6(-100,650) 7(100,550) 8(0,550) 9(-100,550) 10(100,450) 11(0,450) 12(-100,450) 13(100,350) 14(0,350) 15(-100,350) 16(100,250) 17(0,250) 18(-100,250) 19(100,150) 20(0,150) 21(-100,150) 22(100,50) 23(0,50) 24(-100,50) 25(100,-50) 26(0,-50) 27(-100,-50) 28(100,-150) 29(0,-150) 30(-100,-150) 31(100,-250) 32(0,-250) 33(-100,-250) 34(100,-350) 35(0,-350) 36(-100,-350) 37(100,-450) 38(0,-450) 39(-100,-450) 40(100,-550) 41(0,-550) 42(-100,-550) 43(100,-650) 44(0,-650) 45(-100,-650) 46(100,-750) 47(0,-750) 48(-100,-750)
6-PLCC [mil] "6-PLCC"
  rect 51.18x27.56 smd: A1(58.07,43.31) A2(58.07,0) A3(58.07,-43.31) C1(-58.07,43.31) C2(-58.07,0) C3(-58.07,-43.31)
0402-CAP [mil] "0402-CAP"
  rect 19.69x23.62 smd: P$1(-19.69,0) P$2(19.69,0)
0402-RES [mil] "0402-RES"
  rect 19.69x23.62 smd: P$1(-19.69,0) P$2(19.69,0)
0402-TVS [mil] "0402-TVS"
  rect 19.69x23.62 smd: A(19.69,0) C(-19.69,0)
0603-CAP [mil] "0603-CAP"
  rect 23.62x35.43 smd: P$1(-29.53,0) P$2(29.53,0)
0603-LED [mil] "0603-LED"
  rect 23.62x35.43 smd: A(29.53,0) C(-29.53,0)
0603-RES [mm] "0603-RES"
  rect 1.1x1 smd: 1(-0.85,0) 2(0.85,0)
0805-CAP [mil] "0805-CAP"
  rect 27.56x51.18 smd: P$1(-37.4,0) P$2(37.4,0)
0805-IND [mil] "0805-IND"
  rect 27.56x51.18 smd: P$1(-37.4,0) P$2(37.4,0)
1206-8 [mil] "1206-8"
  rect 16x22 smd: P$1(-39,-39) P$2(-13,-39) P$3(13,-39) P$4(39,-39) P$5(39,39) P$6(13,39) P$7(-13,39) P$8(-39,39)
1206-CAP [mil] "1206-CAP"
  rect 35.43x62.99 smd: P$1(-57.09,0) P$2(57.09,0)
51281-1094 [mil] "51281-1094"
  rect 13.39x31.5 smd: 1(0,0) 2(19.69,0) 3(39.37,0) 4(59.06,0) 5(78.74,0) 6(98.43,0) 7(118.11,0) 8(137.8,0) 9(157.48,0) 10(177.17,0)
  rect 23.62x102.36 smd: P$11(-35.43,-90.55) P$12(212.6,-90.55)
DF13C-2P-1.25V [mil] "DF13C-2P-1.25V"
  rect 27.56x70.87 smd: 1(-24.61,35.43) 2(24.61,35.43)
  rect 62.99x86.61 smd: M$0(121.06,-70.87) M$1(-121.06,-70.87)
DF13C-3P-1.25V [mil] "DF13C-3P-1.25V"
  rect 27.56x70.87 smd: 1(-49.21,35.43) 2(0,35.43) 3(49.21,35.43)
  rect 62.99x86.61 smd: M$0(151.57,-70.87) M$1(-151.57,-70.87)
DF13C-4P-1.25V [mil] "DF13C-4P-1.25V"
  rect 27.56x70.87 smd: 1(-73.82,35.43) 2(-24.61,35.43) 3(24.61,35.43) 4(73.82,35.43)
  rect 62.99x86.61 smd: M$0(170.28,-70.87) M$1(-170.28,-70.87)
DF13C-5P-1.25V [mil] "DF13C-5P-1.25V"
  rect 27.56x70.87 smd: 1(-98.43,35.43) 2(-49.21,35.43) 3(0,35.43) 4(49.21,35.43) 5(98.43,35.43)
  rect 62.99x86.61 smd: M$0(194.88,-70.87) M$1(-194.88,-70.87)
DF13C-6P-1.25V [mil] "DF13C-6P-1.25V"
  rect 27.56x70.87 smd: 1(-123.03,35.43) 2(-73.82,35.43) 3(-24.61,35.43) 4(24.61,35.43) 5(73.82,35.43) 6(123.03,35.43)
  rect 62.99x86.61 smd: M$0(219.49,-70.87) M$1(-219.49,-70.87)
DF13C-7P-1.25V [mil] "DF13C-7P-1.25V"
  rect 27.56x70.87 smd: 1(-147.64,35.43) 2(-98.43,35.43) 3(-49.21,35.43) 4(0,35.43) 5(49.21,35.43) 6(98.43,35.43) 7(147.64,35.43)
  rect 62.99x86.61 smd: M$0(244.09,-70.87) M$1(-244.09,-70.87)
EVQP7J01K [mil] "EVQP7J01K"
  rect 55.12x41.34 smd: A1(-70.87,28.54) A2(70.87,28.54) B3(-70.87,-28.54) B4(70.87,-28.54)
EXB28V [mm] "EXB28V"
  rect 0.525x0.5 smd: 1(-0.875,-0.45) 4(0.875,-0.45) 5(0.875,0.45) 8(-0.875,0.45)
  rect 0.25x0.5 smd: 2(-0.25,-0.45) 3(0.25,-0.45) 6(0.25,0.45) 7(-0.25,0.45)
FTSH-105-01-XXX-DV-K [mil] "FTSH-105-01-XXX-DV-K"
  rect 29x110 smd: 1(-100,-80) 2(-100,80) 3(-50,-80) 4(-50,80) 5(0,-80) 6(0,80) 7(50,-80) 8(50,80) 9(100,-80) 10(100,80)
HEADER_3X01_SMD_H_BOARD_EDGE_SHORT [mil] "HEADER_3X01_SMD_H_BOARD_EDGE_SHORT"
  rect 50x70 smd: 1(-100,0) 2(0,0) 3(100,0)
JST-ZH-SMT-VERTICAL [mil] "JST-ZH-SMT-VERTICAL"
  rect 27.56x125.98 smd: P$1(-59.06,-68.9) P$2(0,-68.9) P$3(59.06,-68.9)
  rect 59.06x90.55 smd: P$4(139.76,3.94) P$5(-139.76,3.94)
KYOCERA-KNH16-DA [mil] "KYOCERA-KNH16-DA"
  rect 23.62x23.62 smd: P$1(-31.5,0) P$2(31.5,0)
  rect 15.75x15.75 smd: P$3(0,-15.75) P$4(0,15.75)
  rect 21.65x21.65 / inner rect 60x60 / far side rect 21.65x21.65 hole 11.81: P$5(0,0)
L3G4200DH-MAN [mil] "L3G4200DH-MAN"
  rect 35.43x15.75 smd: 1(-74.8,38.39) 2(-74.8,12.8) 3(-74.8,-12.8) 4(-74.8,-38.39) 9(74.8,-38.39) 10(74.8,-12.8) 11(74.8,12.8) 12(74.8,38.39)
  rect 15.75x35.43 smd: 5(-38.39,-74.8) 6(-12.8,-74.8) 7(12.8,-74.8) 8(38.39,-74.8) 13(38.39,74.8) 14(12.8,74.8) 15(-12.8,74.8) 16(-38.39,74.8)
  Top keep-out region: -62.99,-62.99 -62.99,62.99 62.99,62.99 62.99,-62.99
LGA-16L [mm] "LGA-16L"
  rect 0.65x0.3 smd: 1(-1.37,1) 2(-1.37,0.5) 3(-1.37,0) 4(-1.37,-0.5) 5(-1.37,-1) 9(1.37,-1) 10(1.37,-0.5) 11(1.37,0) 12(1.37,0.5) 13(1.37,1)
  rect 0.3x0.65 smd: 6(-0.5,-1.37) 7(0,-1.37) 8(0.5,-1.37) 14(0.5,1.37) 15(0,1.37) 16(-0.5,1.37)
MICROSD [mil] "MICROSD"
  rect 31.5x59.06 smd: 1(-76.38,106.3) 2(-33.07,90.55) 3(10.24,106.3) 4(53.54,114.17) 5(96.85,106.3) 6(140.16,114.17) 7(183.46,106.3) 8(226.77,106.3)
  rect 55.12x74.8 smd: NC(-269.69,257.87) NC3(257.87,218.5)
  rect 70.87x55.12 smd: NC1(-29.53,-299.21) NC2(194.88,-299.21)
MICROSMP [mil] "MICROSMP"
  rect 31.5x31.5 smd: ANODE(25.59,0)
  rect 78.74x43.31 smd: CATHODE(-49.21,0)
MLF-8-EPAD [mil] "MLF-8-EPAD"
  rect 19.69x11.81 smd: 1(-31.5,29.53)
  rrect40% 19.69x11.81 smd: 2(-31.5,9.84) 3(-31.5,-9.84) 4(-31.5,-29.53) 5(31.5,-29.53) 6(31.5,-9.84) 7(31.5,9.84) 8(31.5,29.53)
  rrect40% 27.56x55.12 smd: GND(0,0)
MO-220 [mil] "MO-220"
  rect 27.56x9.84 smd: P$1(-74.8,49.21) P$2(-74.8,29.53) P$3(-74.8,9.84) P$4(-74.8,-9.84) P$5(-74.8,-29.53) P$6(-74.8,-49.21) P$13(74.8,-49.21) P$14(74.8,-29.53) P$15(74.8,-9.84) P$16(74.8,9.84) P$17(74.8,29.53) P$18(74.8,49.21)
  rect 9.84x27.56 smd: P$7(-49.21,-74.8) P$8(-29.53,-74.8) P$9(-9.84,-74.8) P$10(9.84,-74.8) P$11(29.53,-74.8) P$12(49.21,-74.8) P$19(49.21,74.8) P$20(29.53,74.8) P$21(9.84,74.8) P$22(-9.84,74.8) P$23(-29.53,74.8) P$24(-49.21,74.8)
  rect 96.46x96.46 smd paste+0: P$25(0,0)
MOLEX-47346-0001 [mm] "MOLEX-47346-0001"
  rect 1.7x0.44 smd: D+(2.8,0) D-(2.8,0.65) GND(2.8,-1.3) ID(2.8,-0.65) VBUS(2.8,1.3)
  rect 1.9x2.375 smd: GND1(0,2.95) GND4(0,-2.95)
  rect 2.1x1.475 smd: GND2(2.3,2.5) GND3(2.3,-2.5)
  rect 1.9x1.175 smd: GND5(0,-0.837) GND6(0,0.837)
  Top keep-out region: 1.2,-1.6 1.2,1.6 1.85,1.6 1.85,-1.6
MS621FE [mm] "MS621FE"
  rect 3x0.75 smd: 1(5.15,0.75) 2(5.15,-0.75)
MS5611-01BA [mil] "MS5611-01BA"
  rect 43.31x23.62 smd: 1(-43.31,73.82) 2(-43.31,24.61) 3(-43.31,-24.61) 4(-43.31,-73.82) 5(43.31,-73.82) 6(43.31,-24.61) 7(43.31,24.61) 8(43.31,73.82)
OSCILLATOR-3.2X2.5 [mil] "OSCILLATOR-3.2X2.5"
  rect 55.12x47.24 smd: 1(-43.31,-33.46) 2(43.31,-33.46) 3(43.31,33.46) 4(-43.31,33.46)
PTC-1206 [mm] "PTC-1206"
  rect 1x1.8 smd: 1(-1.4,0) 2(1.4,0)
QFN8-DSG [mil] "QFN8-DSG"
  rect 11.02x19.69 smd: 1(-29.53,-37.4) 2(-9.84,-37.4) 3(9.84,-37.4) 4(29.53,-37.4) 5(29.53,37.4) 6(9.84,37.4) 7(-9.84,37.4) 8(-29.53,37.4)
  rect 62.99x35.43 smd: GND(0,0)
  rect 21.65x21.65 / inner rect 60x60 / far side rect 21.65x21.65 hole 11.81: P$2(-15.75,0) P$3(15.75,0)
QFN20-RGY [mil] "QFN20-RGY"
  rect 11.02x33.46 smd: 1(-29.53,88.58) 10(-29.53,-88.58) 11(29.53,-88.58) 20(29.53,88.58)
  rect 33.46x11.02 smd: 2(-68.9,68.9) 3(-68.9,49.21) 4(-68.9,29.53) 5(-68.9,9.84) 6(-68.9,-9.84) 7(-68.9,-29.53) 8(-68.9,-49.21) 9(-68.9,-68.9) 12(68.9,-68.9) 13(68.9,-49.21) 14(68.9,-29.53) 15(68.9,-9.84) 16(68.9,9.84) 17(68.9,29.53) 18(68.9,49.21) 19(68.9,68.9)
QFN-24 [mil] "QFN-24"
  rect 31.5x11.42 smd: 1(-78.74,49.21) 2(-78.74,29.53) 3(-78.74,9.84) 4(-78.74,-9.84) 5(-78.74,-29.53) 6(-78.74,-49.21) 13(78.74,-49.21) 14(78.74,-29.53) 15(78.74,-9.84) 16(78.74,9.84) 17(78.74,29.53) 18(78.74,49.21)
  rect 11.42x31.5 smd: 7(-49.21,-78.74) 8(-29.53,-78.74) 9(-9.84,-78.74) 10(9.84,-78.74) 11(29.53,-78.74) 12(49.21,-78.74) 19(49.21,78.74) 20(29.53,78.74) 21(9.84,78.74) 22(-9.84,78.74) 23(-29.53,78.74) 24(-49.21,78.74)
  Top region: -19.69,-19.69 -19.69,19.69 19.69,19.69 19.69,-19.69
SO08 [mil] "SO08"
  rect 24x87 smd: 1(-75,-103) 2(-25,-103) 3(25,-103) 4(75,-103) 5(75,103) 6(25,103) 7(-25,103) 8(-75,103)
SOD323 [mil] "SOD323"
  rect 31.5x23.62 smd: A(49.21,0) C(-49.21,0)
SON10 [mm] "SON10"
  rect 0.32x0.5 smd: 1(-1,-1.375) 2(-0.5,-1.375) 3(0,-1.375) 4(0.5,-1.375) 5(1,-1.375) 6(1,1.375) 7(0.5,1.375) 8(0,1.375) 9(-0.5,1.375) 10(-1,1.375)
SOT23-3 [mil] "SOT23-3"
  rect 31.5x35.43 smd: 1(-37.4,-39.37) 2(37.4,-39.37) 3(0,43.31)
SOT23-8 [mm] "SOT23-8"
  rect 0.42x1.3 smd: 1(-0.975,-1.175) 2(-0.325,-1.175) 3(0.325,-1.175) 4(0.975,-1.175) 5(0.975,1.175) 6(0.325,1.175) 7(-0.325,1.175) 8(-0.975,1.175)
SOT563-6 [mil] "SOT563-6"
  rect 11.81x17.72 smd: 1(-19.69,-26.57) 2(0,-26.57) 3(19.69,-26.57) 4(19.69,26.57) 5(0,26.57) 6(-19.69,26.57)
TQFP48 [mm] "TQFP48"
  rect 0.24x1 smd: 1(-2.75,-4.5) 2(-2.25,-4.5) 3(-1.75,-4.5) 4(-1.25,-4.5) 5(-0.75,-4.5) 6(-0.25,-4.5) 7(0.25,-4.5) 8(0.75,-4.5) 9(1.25,-4.5) 10(1.75,-4.5) 11(2.25,-4.5) 12(2.75,-4.5) 25(2.75,4.5) 26(2.25,4.5) 27(1.75,4.5) 28(1.25,4.5) 29(0.75,4.5) 30(0.25,4.5) 31(-0.25,4.5) 32(-0.75,4.5) 33(-1.25,4.5) 34(-1.75,4.5) 35(-2.25,4.5) 36(-2.75,4.5)
  rect 1x0.24 smd: 13(4.5,-2.75) 14(4.5,-2.25) 15(4.5,-1.75) 16(4.5,-1.25) 17(4.5,-0.75) 18(4.5,-0.25) 19(4.5,0.25) 20(4.5,0.75) 21(4.5,1.25) 22(4.5,1.75) 23(4.5,2.25) 24(4.5,2.75) 37(-4.5,2.75) 38(-4.5,2.25) 39(-4.5,1.75) 40(-4.5,1.25) 41(-4.5,0.75) 42(-4.5,0.25) 43(-4.5,-0.25) 44(-4.5,-0.75) 45(-4.5,-1.25) 46(-4.5,-1.75) 47(-4.5,-2.25) 48(-4.5,-2.75)
TQFP100 [mm] "TQFP100"
  rect 1.5x0.29 smd: 1(-8,6) 2(-8,5.5) 3(-8,5) 4(-8,4.5) 5(-8,4) 6(-8,3.5) 7(-8,3) 8(-8,2.5) 9(-8,2) 10(-8,1.5) 11(-8,1) 12(-8,0.5) 13(-8,0) 14(-8,-0.5) 15(-8,-1) 16(-8,-1.5) 17(-8,-2) 18(-8,-2.5) 19(-8,-3) 20(-8,-3.5) 21(-8,-4) 22(-8,-4.5) 23(-8,-5) 24(-8,-5.5) 25(-8,-6) 51(8,-6) 52(8,-5.5) 53(8,-5) 54(8,-4.5) 55(8,-4) 56(8,-3.5) 57(8,-3) 58(8,-2.5) 59(8,-2) 60(8,-1.5) 61(8,-1) 62(8,-0.5) 63(8,0) 64(8,0.5) 65(8,1) 66(8,1.5) 67(8,2) 68(8,2.5) 69(8,3) 70(8,3.5) 71(8,4) 72(8,4.5) 73(8,5) 74(8,5.5) 75(8,6)
  rect 0.29x1.5 smd: 26(-6,-8) 27(-5.5,-8) 28(-5,-8) 29(-4.5,-8) 30(-4,-8) 31(-3.5,-8) 32(-3,-8) 33(-2.5,-8) 34(-2,-8) 35(-1.5,-8) 36(-1,-8) 37(-0.5,-8) 38(0,-8) 39(0.5,-8) 40(1,-8) 41(1.5,-8) 42(2,-8) 43(2.5,-8) 44(3,-8) 45(3.5,-8) 46(4,-8) 47(4.5,-8) 48(5,-8) 49(5.5,-8) 50(6,-8) 76(6,8) 77(5.5,8) 78(5,8) 79(4.5,8) 80(4,8) 81(3.5,8) 82(3,8) 83(2.5,8) 84(2,8) 85(1.5,8) 86(1,8) 87(0.5,8) 88(0,8) 89(-0.5,8) 90(-1,8) 91(-1.5,8) 92(-2,8) 93(-2.5,8) 94(-3,8) 95(-3.5,8) 96(-4,8) 97(-4.5,8) 98(-5,8) 99(-5.5,8) 100(-6,8)
TSSOP8_SOT505-2 [mm] "TSSOP8_SOT505-2"
  rect 0.35x0.85 smd: 1(-0.975,-1.775) 2(-0.325,-1.775) 3(0.325,-1.775) 4(0.975,-1.775) 5(0.975,1.775) 6(0.325,1.775) 7(-0.325,1.775) 8(-0.975,1.775)

## Part data
B601: "SEIKO 6.8mm Rechargeable 3V lithium batteryIf discontinued or not available, similar devices are available from Panasonic and Sanyo, usually direct replacements.", PackageName=MS621FE
C101 C102 C103 C201 C202 C401 C402 C502 C503 C504 C505 C507 C508 C510 C514 C602 C606 C607 C608 C609 C610 C612 C615 C616 C617 C701 C703 C704 C801 C802 C803 C804 C805 C806 C901 C902 C903 C1002 C1005 C1008 C1105 C1106 C1107 C1108 C1109 C1110: library part CAP0402, "CapacitorStandard 0603 ceramic capacitor, and 0.1\" leaded capacitor.", PackageName=0402-CAP
C501 C506 C509 C511 C601 C604 C605 C1001 C1101 C1102 C1103: library part CAP0805, "CapacitorStandard 0603 ceramic capacitor, and 0.1\" leaded capacitor.", PackageName=0805-CAP
C512 C513 C515 C603 C611 C613 C702 C1003 C1004: library part CAP0603, "CapacitorStandard 0603 ceramic capacitor, and 0.1\" leaded capacitor.", PackageName=0603-CAP
C614 C618 C1104: library part CAP1206, "CapacitorStandard 0603 ceramic capacitor, and 0.1\" leaded capacitor.", PackageName=1206-CAP
D201 D202 D203 D401 D402 D403 D404 D701 D801 D901 D902 D903: library part DIODE-TVS, PackageName=0402-TVS
D602: library part DIODE-SCHOTTKY_SOD323, "Schottky barrier diode in DO214AC, e.g. Fairchild SS14.", PackageName=SOD323
D904: library part DIODE-SCHOTTKY_MSMP, "Schottky barrier diode in DO214AC, e.g. Fairchild SS14.", PackageName=MICROSMP
D1001: "500 mA low VF dual MEGA Schottky barrier rectifierhttp://www.nxp.com/documents/data_sheet/PMEG2005CT.pdf", PackageName=SOT23-3
F1001: library part PTCSMD, "Resettable Fuse PTCResettable Fuse. Spark Fun Electronics SKU : COM-08357", PackageName=PTC-1206
J201 J202 J203 J204 J601: library part DF13-6P-1.25V, "DF13-6P 1.25mm Pitch Miniature Crimping Connector.", PackageName=DF13C-6P-1.25V
J301: library part MOLEX-47346-0001, "MICRO USB B, BOTTOM MOUNT", PackageName=MOLEX-47346-0001
J302 J401 J405: library part DF13-4P-1.25V, "DF13-4P 1.25mm Pitch Miniature Crimping Connector.", PackageName=DF13C-4P-1.25V
J402 J702: library part DF13-3P-1.25V, "DF13-3P 1.25mm Pitch Miniature Crimping Connector.", PackageName=DF13C-3P-1.25V
J403: library part DF13-7P-1.25V, "DF13-7P 1.25mm Pitch Miniature Crimping Connector.", PackageName=DF13C-7P-1.25V
J404: library part DF13-5P-1.25V, "DF13-5P 1.25mm Pitch Miniature Crimping Connector.", PackageName=DF13C-5P-1.25V
J701: library part DF13-2P-1.25V, "DF13-2P 1.25mm Pitch Miniature Crimping Connector.", PackageName=DF13C-2P-1.25V
J801: library part JST-ZH-3, PackageName=JST-ZH-SMT-VERTICAL
J901: library part HEADER-3X163X16RA, "3x16 servo header", PackageName=3X16RA
JX301 JX802: "CONNECTORwire to board 1.25 mm (.049 inch) pitch header", PackageName=FTSH-105-01-XXX-DV-K
JX801: library part HEADER-3X1BOARDEDGE-SHORT, "Single row 0.1\" servo header", PackageName=HEADER_3X01_SMD_H_BOARD_EDGE_SHORT
L201 L202 L203 L401 L402 L403 L404 L603 L901 L1101 L1102: library part KNH16C104DA5TS, "Kyocera KNH16C104DA5TS EMI filter", PackageName=KYOCERA-KNH16-DA
L701: library part INDUCTOR0805, "InductorsBasic Inductor/Choke - 0603 and 1210. Footprints are not proven and vary greatly between part numbers. SRR1210: Bourns SRR1210 parts, e.g. SRR1210-100M", PackageName=0805-IND
LED701 LED702 LED703 LED704 LED705: library part LED0603, "LEDsStandard schematic elements and footprints for 5mm, 3mm, 1206, and 0603 sized LEDs. 5mm - Spark Fun Electronics SKU : COM-00529 (and others)", PackageName=0603-LED
R101 R102 R201 R202 R203 R204 R205 R206 R207 R208 R209 R210 R211 R212 R213 R214 R215 R216 R301 R302 R303 R304 R305 R306 R307 R401 R402 R403 R404 R405 R406 R407 R408 R409 R602 R603 R604 R608 R609 R610 R611 R615 R616 R617 R635 R701 R702 R703 R704 R705 R706 R707 R708 R709 R710 R711 R712 R713 R735 R736 R801 R802 R803 R804 R901 R902 R903 R904 R905 R906 R907 R908 R909 R910 R911 R912 R913 R914 R915 R916 R917 R918 R919 R922 R1001 R1002 R1101 R1102 R1103 R1104 R1105 R1106 R1107 R1109 R1110 R1111 R1112 R1113 R1114 R1115: library part RESISTOR0402-RES, "ResistorBasic schematic elements and footprints for 0603, 1206, and PTH 1/10th watt (small) resistors.", PackageName=0402-RES
R621: library part RESISTOR0603-RES, "ResistorBasic schematic elements and footprints for 0603, 1206, and PTH 1/10th watt (small) resistors.", PackageName=0603-RES
RN1101: library part 4R-NEXB28V, "Array Chip ResistorSource: RS Component / Phycomp", PackageName=EXB28V
S601 S801: library part SWITCH-MOMENTARY-2, PackageName=EVQP7J01K
U101: "STM32F4X7VX 100 pin LQFP STM32F407VE - 512 KB flash, no crypto STM32F407VG - 1 MB flash, no crypto STM32F417VE - 512 KB flash, with crypto STM32F417VG - 1 MB flash, with crypto", PackageName=TQFP100
U102: "FM25V01 128Kb Serial 3V F-RAM Memory", PackageName=SO08
U201 U202 U901 U902: library part TXS0108QFN20, PackageName=QFN20-RGY
U301: library part MICROSDSDI, PackageName=MICROSD
U302: PackageName=SOT563-6
U401: library part MAX3051MAX3051EKA, "3.3-V CAN TRANSCEIVER", PackageName=SOT23-8
U501: library part L3G4200DH-LL, "L3G4200DH - Digital 3-axis GyroscopeThe L3G4200DH is a low-power three-axis angular rate sensor. The L3G4200DH has a full scale of ±250/±500/ ±2000 dps and is capable of measuring rates with a user-selectable bandwidth. It can operate within a temperature range from -40 °C to +85 °C. Supply voltage: 2.4 V to 3.6 V. Full datasheet:L3G4200DH Datasheet", PackageName=L3G4200DH-MAN
U502: "L3GD20H MEMS motion sensor: 3-axis digital output gyroscope", PackageName=LGA-16L
U504: "LSM303D Ultra compact high performance e-compass: 3D accelerometer and 3D magnetometer module", PackageName=LGA-16L
U505: "Invensense MPU-6000: 3-axis gyro, 3-axis accel & 9-axis MotionFusionThe MPU-60X0 Motion Processing Unit (MPU?) is the world?s first motion processing solution with integrated 9-axis sensor fusion for handset and tablet applications, game controllers, motion pointer remote controls, and other consumer devices. The MPU-60X0 has an embedded 3-axis MEMS gyroscope, 3-axis MEMS accelerometer and Digital Motion Processor? (DMP) hardware accelerator engine with an auxiliary I 2 C port that interfaces to third party digital sensors, such as magnetometers. Interfacing with a 3-axis magnetometer delivers a complete 9-axis sensor fusion output to the MPU?s primary I 2 C or SPI port. (SPI is available on MPU-6000 only). This combines acceleration and rotational motion plus heading information into a single data stream for the application", PackageName=QFN-24
U506: "MS5611-01BAThe MS5611-01BA is a new generation of high resolution altimeter sensors from MEAS Switzerland with SPI and I 2 C bus interface. It is optimized for altimeters and  variometers with an altitude resolution of 10 cm. The sensor module includes a high linearity pressure sensor and an ultra low power 24 bit ?? ADC with internal factory calibrated coefficients. It provides a precise digital 24 Bit pressure and temperature value and different operation modes that allow the user to optimize for conversion speed and current consumption. A high resolution temperature output allows the implementation of an altimeter/thermometer function without any additional sensor. The MS5611-01BA can be interfaced to virtually any microcontroller. The communication protocol is simple, without the need of programming internal registers in the device. Small dimensions of only 5.0 mm x 3.0 mm and a height of 1.7 mm allow for integration in mobile devices. This new sensor module generation is based on leading MEMS technology and latest benefits from  MEAS Switzerland proven experience and know-how in high volume manufacturing of altimeter modules, which have been widely used for over a decade. The sensing principle employed leads to very low hysteresis and high stability of both pressure and temperature signal.", PackageName=MS5611-01BA
U601 U602: library part BQ24315, PackageName=QFN8-DSG
U603 U1002: PackageName=MLF-8-EPAD
U701: "Toshiba TCA62724FMG I2C RGB LED driver", PackageName=SON10
U702: "LT3469 Piezo microactuator driver with boost regulator", PackageName=SOT23-8
U703: library part RGB-LED6-PLCC, "RGB LED with separate anode/cathode terminals", PackageName=6-PLCC
U801: "ST STM32F101/103 48pin LQFP", PackageName=TQFP48
U903: library part 74LVC2G240-TSSOP-8, "Dual inverter tri-state, 3.3V/5V compatible http://www.nxp.com/documents/data_sheet/74LVC2G240.pdfhttp://focus.ti.com/lit/ds/symlink/sn74lvc2g240.pdf", PackageName=TSSOP8_SOT505-2
U1001: library part BQ24313, PackageName=QFN8-DSG
U1101: library part LTC4117, PackageName=MO-220
U1102 U1103 U1104: library part MOSFET-DUAL-PCHANNEL-CHIPFET, PackageName=1206-8
X101 X801: library part OSCILLATOR-3.2X2.5, "Crystal Oscillator in 3.2x2.5 SMD", PackageName=OSCILLATOR-3.2X2.5
X503: library part CONN_FPC_10RA, "10-pin FPC connector for PX4 sensor board", PackageName=51281-1094

## Via types
v1: diameter 18, hole 10, Top to Bottom, 374 vias

## Nets (pads, with @x,y where several pads share a name; then routed paths per layer and width w, separated by ;. In a path a pad name is that pad's centre, name@x,y a point inside that pad or via, vN(x,y) a via of type N, cw(c..) or ccw(c..) an arc to the next point about the centre after c; other vN are vias at no path point)
!ACCEL_MAG_CS: U101.9 U504.8 X503.6 | length 2829.4
  Top w7: U101.9@4117.38,6791.42 4420.18,6791.42 4608.11,6603.49 4608.11,6557.71 4729.38,6436.44 4729.38,6419.12 4833.29,6315.2 4968.25,6315.2 4981.82,6301.63 4981.82,6282.68 4997.82,6266.68 5072.39,6266.68 v1(5102.34,6296.63) ; X503.6@5172.66,5307.68 5172.66,5458 5207.34,5492.68 5316.03,5492.68 v1(5330.56,5507.21) ; v1(5417.34,5807.68) 5417.34,5811.75 5418.27,5812.68 U504.8@5418.27,5784.22 5418.27,5738.57 v1(5423.27,5733.57)
  Bottom w7: v1(5102.34,6296.63) 5142.34,6256.63 5142.34,5952.68 5258.96,5836.06 5258.96,5718.56 5287.09,5690.43 5341.89,5690.43 5370,5718.55 5370,5750.35 5417.34,5797.68 v1(5417.34,5807.68) ; v1(5330.56,5507.21) 5332.34,5507.68 5423.27,5598.61 v1(5423.27,5733.57)
!BARO_CS: U101.88 U506.5 | length 3771.3
  Top w8: v1(4294.54,7313.53) 4308.74,7299.32 4367.34,7299.32 4432.34,7234.32 U101.88@4432.34,7027.64 ; v1(4701.65,5988.5) 4701.65,6026.8 4726.84,6051.99 4766.52,6051.99 4822.81,6108.28 4822.81,6204.69 4809.82,6217.68 4809.82,6263.31 4815.48,6268.97 4842.9,6268.97 v1@4850.04,6261.83 ; U506.5@4880.54,5255.99 4880.54,5272.49 v1(4938.14,5330.09)
  Bottom w8: v1(4294.54,7313.53) 4294.54,7352.2 4370.46,7428.13 4499.24,7428.13 4549.84,7377.53 4549.84,7097.86 4822.34,6825.36 4822.34,6792.68 4808.96,6779.3 4807.34,6779.3 4799.82,6771.78 4799.82,6745.23 4832.36,6712.68 4972.34,6712.68 5005.34,6679.68 5005.34,6462.61 4957.34,6414.61 4906.04,6414.61 4895.02,6403.6 4895.02,6352.3 4852.7,6309.97 v1@4852.7,6258.82 ; v1(4701.65,5988.5) 4719.64,6006.49 4931.56,6006.49 5012.85,5925.2 5012.85,5885.82 4993.4,5866.38 4946.04,5866.38 4902.34,5822.68 4902.34,5622.68 4887.34,5607.68 4887.34,5412.68 4938.14,5361.88 v1(4938.14,5330.09)
  other v1: 4852.18,6263.97
!FMU-LED_AMBER: R707.P$1 U101.43 | length 1757
  Top w7: R707.P$1@4045.12,5507.37 4072.78,5507.37 v1(4083.09,5517.68) ; U101.43@4530.77,6397.72 4530.77,6350.46 4537.44,6343.79 4562.34,6343.79 4567.34,6338.79 4567.34,6217.68 4533.72,6184.06 4533.72,6147.68 v1@4533.13,6147.68
  Bottom w7: v1(4083.09,5517.68) 4083.68,5517.68 4083.68,5604.37 4009.84,5678.21 4009.84,5881.74 4025.78,5897.68 4027.34,5897.68 4037.34,5907.68 4158.71,5907.68 4184.47,5881.92 4319.24,5881.92 4345,5907.68 4442.34,5907.68 4507.34,5842.68 4582.08,5842.68 4665,5925.6 4665,5963.88 4609.95,6018.93 4609.95,6053.41 4533.13,6130.23 v1@4533.13,6147.68
  other v1: 4532.34,6147.68
!FRAM_CS: U101.57 U102.1 | length 674.4
  Top w7: U101.57@4747.3,6594.57 4902.86,6594.57 4920.34,6612.05 4920.34,6640.68 4932.34,6652.68 4967.34,6652.68 4972.34,6647.68 4972.34,6537.31 4981.82,6527.83 5004.01,6527.83 5024.22,6548.04 5024.22,6647.68 5029.22,6652.68 5087.34,6652.68 5096.57,6643.45 U102.1@5096.57,6589.45
!GYRO_CS: U101.7 U501.5 U502.5 X503.7 | length 3239.6
  Top w7: X503.7@5192.34,5307.68 5192.34,5327.44 5242.46,5377.56 5313.27,5377.56 5420.4,5484.68 5490.81,5484.68 5581.87,5575.74 v1(5581.87,5597.68)
  Top w8: U101.7@4117.38,6830.79 4400.8,6830.79 4619.39,6612.2 v1(4643.88,6612.2) ; v1(4777.65,6432.7) 4777.65,6396.92 4841.88,6332.68 4975.61,6332.68 5012.85,6295.44 v1(5012.85,6290.19) ; v1(4982.34,6132.37) 4982.34,6104.88 4996.15,6091.07 U501.5@5027.54,6091.07 ; v1(4982.34,6213.78) 4984.54,6212.68 4993.04,6221.18 5374.15,6221.18 5464.9,6130.43 U502.5@5464.9,6098.05
  Bottom w7: v1@5464.9,6130.43 5457.34,6137.68 5558.23,6137.68 5627.34,6068.57 5627.34,5643.15 v1(5581.87,5597.68)
  Bottom w8: v1(4643.88,6612.2) 4643.88,6613.59 4645.34,6612.68 4692.34,6612.68 4777.65,6527.37 v1(4777.65,6432.7) ; v1(4982.34,6132.37) 4982.34,6133.74 v1(4982.34,6213.78) 4982.34,6261.04 5011.49,6290.19 v1(5012.85,6290.19)
  other v1: 5462.34,6132.89
!IO-LED_AMBER: R709.P$1 U801.28 | length 427.2
  Top w7: R709.P$1@3972.34,5507.21 3976.87,5502.68 v1(3997.34,5502.68) ; v1(3992.34,5572.68) 3992.34,5558.32 3995.28,5555.38 4212.01,5555.38 4243.13,5586.5 U801.28@4243.13,5628.42
  Bottom w7: v1(3992.34,5572.68) 3987.34,5572.68 3987.34,5512.68 v1(3997.34,5502.68)
!IO-LED_BLUE: R712.P$1 U801.27 | length 533.8
  Top w7: R712.P$1@3897.34,5412.52 3928.13,5443.31 3928.13,5513.47 v1(3937.34,5522.68) ; v1(3947.34,5572.68) 3947.34,5577.36 3967.66,5597.68 4001.72,5597.68 4031.72,5567.68 4207.34,5567.68 4223.44,5583.78 U801.27@4223.44,5628.42
  Bottom w7: v1(3937.34,5522.68) 3947.34,5532.68 v1(3947.34,5572.68)
!IO-LED_SAFETY: R710.P$2 U801.26 | length 348.1
  Top w7: v1(4172.34,5585.75) 4172.34,5586.38 4192.34,5586.38 4203.76,5597.8 U801.26@4203.76,5628.42 ; v1(4332.34,5567.68) 4327.34,5567.68 4362.34,5532.68 R710.P$2@4362.34,5466.89
  Bottom w7: v1(4172.34,5585.75) 4314.27,5585.75 v1@4327.34,5572.68
!MPU_CS: U101.17 U505.8 | length 3977
  Top w7: v1@3622.62,5913.86 3621.28,5915.2 3621.28,6111.63 3672.34,6162.68 3706.71,6162.68 3726.55,6182.52 3726.55,6421.42 3772.34,6467.21 v1(3772.34,6477.68) ; v1(4044.74,6644.07) 4045.34,6644.07 4055.47,6633.94 U101.17@4117.38,6633.94
  Top w8: v1(3595.26,5514.07) 3595.26,5784.65 v1@3617.34,5806.73 ; v1(4984.54,5897.68) 4972.34,5885.48 4972.34,5767.68 4982.5,5757.52 U505.8@5024.22,5757.52
  Bottom w7: v1(3772.34,6477.68) 3755.01,6477.68 3686.62,6546.07 3686.62,6646.58 3730.23,6690.18 3779.84,6690.18 3825.95,6644.07 v1(4044.74,6644.07)
  Bottom w8: v1@3592.34,5519.07 3592.34,5482.85 3727.5,5347.68 4237.34,5347.68 4317.34,5267.68 4782.34,5267.68 4831.33,5316.67 4831.33,5581.7 4887.34,5637.71 4887.34,5826.31 4958.71,5897.68 v1(4984.54,5897.68) ; v1(3615.57,5807.68) 3624.2,5816.32 v1(3624.2,5910.2)
!SBUS_OUTPUT_EN: U801.40 U903.7 | length 1888.7
  Top w7: U903.7@3593.45,5282.8 3593.45,5252.04 3617.81,5227.68 3697.78,5227.68 3757.78,5287.68 4253.52,5287.68 4272.34,5306.5 4272.34,5432.68 4287.34,5447.68 4443.91,5447.68 4467.34,5424.25 4467.34,5407.68 4547.34,5327.68 4648.4,5327.68 4677.34,5356.62 4677.34,5462.99 4643.88,5496.45 4643.88,5653.11 4540.61,5756.38 U801.40@4469.51,5756.38
!SPI_EXT_NSS: J403.5 U101.3 | length 209.4
  Top w8: v1(4009.74,6979.26) 4009.74,6962.13 4062.34,6909.53 U101.3@4117.38,6909.53
  Bottom w8: J403.5@3946.91,6979.26 v1(4009.74,6979.26)
!VBUS_VALID: RN1101.2 U101.15 U1101.P$9 | length 1615.5
  Top w7: U1101.P$9@3647.34,7407.68 3647.34,7384.37 v1@3672.84,7358.87 ; v1(3674.77,7358.87) 3674.77,7340.43 3667.02,7332.68 3667.02,7290.73 3675.78,7281.97 RN1101.2@3692.34,7281.97
  Top w8: v1@3735.86,7108.53 3645.48,7018.15 3645.48,6773.78 3671.58,6747.68 3742.87,6747.68 3808.97,6681.58 3808.97,6541.1 3853.92,6496.14 3930.83,6496.14 3951.03,6516.34 3951.03,6565.9 3997.34,6612.2 3997.34,6661.58 4009.07,6673.31 U101.15@4117.38,6673.31
  Bottom w7: v1@3672.84,7358.87 v1(3674.77,7358.87) 3677.34,7356.3 3677.34,7176.15 3740.8,7112.68 v1@3735.01,7107.68
  other v1: 3737.5,7112.68
!VDD_5V_HIPOWER_OC: R602.P$1 U101.41 U601.4 | length 1428.5
  Top w7: U101.41@4491.4,6397.72 4491.4,6350.78 4518.43,6323.75 4545.47,6323.75 v1(4545.47,6318.86) ; v1(4845.5,6367.91) 4860.27,6382.68 v1(4917.34,6382.68) ; v1(5322.03,6742.05) 5332.66,6752.68 5537.7,6752.68 5541.4,6748.98 ; U601.4@5541.4,6777.88 5541.4,6748.98 ; R602.P$1@5554.09,6736.29 5541.4,6748.98
  Bottom w7: v1(4545.47,6318.86) 4726.44,6318.86 4786.3,6378.72 4786.3,6399.27 4799.82,6412.79 4837.93,6412.79 4847.34,6403.38 4847.34,6369.74 v1(4845.5,6367.91) ; v1(4917.34,6382.68) 4957.34,6382.68 5032.34,6457.68 5061.84,6457.68 5121.94,6517.78 5122.44,6517.78 5322.82,6718.16 5322.82,6737.05 v1(5322.03,6742.05)
!VDD_5V_PERIPH_EN: R615.P$1 U101.67 U601.5 U602.5 | length 1592.7
  Top w7: U101.67@4747.3,6791.42 4851.08,6791.42 4857.34,6797.68 4857.34,6815.79 4872.34,6830.79 4954.23,6830.79 4967.34,6817.68 4987.34,6817.68 5032.34,6772.68 5032.34,6742.68 5092.34,6682.68 5196.71,6682.68 v1(5216.71,6702.68) ; v1(5303.52,6789.49) 5303.52,6940.79 5345.41,6982.68 5523.88,6982.68 5541.4,6965.16 U601.5@5541.4,6852.68 5555.88,6852.68 5562.34,6846.22 5562.34,6769.98 5574.64,6757.68 5574.64,6714.98 5552.65,6692.99 5481.91,6692.99 R615.P$1@5476.71,6687.79 5476.71,6678.28 5488.37,6666.62 U602.5@5488.37,6635.08
  Bottom w7: v1(5216.71,6702.68) 5217.5,6697.68 5257.34,6697.68 5304.31,6744.65 5304.31,6784.49 v1(5303.52,6789.49)
!VDD_5V_PERIPH_OC: R604.P$1 U101.46 U602.4 | length 1374.7
  Top w7: U101.46@4589.82,6397.72 4589.82,6440.16 4607.34,6457.68 4660.21,6457.68 4692.34,6425.55 4692.34,6416.43 4826.08,6282.68 4937.34,6282.68 4965.34,6254.68 5089.65,6254.68 5172.34,6337.37 v1(5172.34,6452.99) ; v1(5447.93,6527.68) 5477.34,6527.68 5488.37,6538.71 U602.4@5488.37,6560.28 5507.34,6579.25 5507.34,6632.37 R604.P$1@5542.65,6667.68
  Bottom w7: v1(5172.34,6452.99) 5172.93,6452.68 5247.93,6527.68 v1(5447.93,6527.68)
!VDD_BRICK_VALID: RN1101.4 U101.91 U1101.P$7 | length 1219.2
  Top w7: U1101.P$7@3607.97,7407.68 3607.97,7372.36 3617.65,7362.68 3630.48,7362.68 3642.03,7351.13 3642.03,7280.55 3630.48,7269 3630.48,7253.27 3656.07,7227.68 3682.34,7227.68 RN1101.4@3692.34,7237.68 3692.34,7220.18 3699.84,7212.68 4152,7212.68 v1(4203.76,7264.44) ; v1(4323.13,7262.68) 4342.34,7262.68 4396.71,7208.31 4396.71,7123.47 4373.28,7100.04 U101.91@4373.28,7027.64
  Bottom w7: v1(4203.76,7264.44) 4203.13,7262.68 v1(4323.13,7262.68)